# Altium PCB PCB1.pcbdoc
Units mil, origin at the board's own origin, x right, y up, seen from the top; angles counter-clockwise.
Board outline 3800 x 2700 mil, 2 copper layers (Top Layer, Bottom Layer), stack 62.2 mil thick; 15 components, 11 nets, 84 pads, 8 vias.
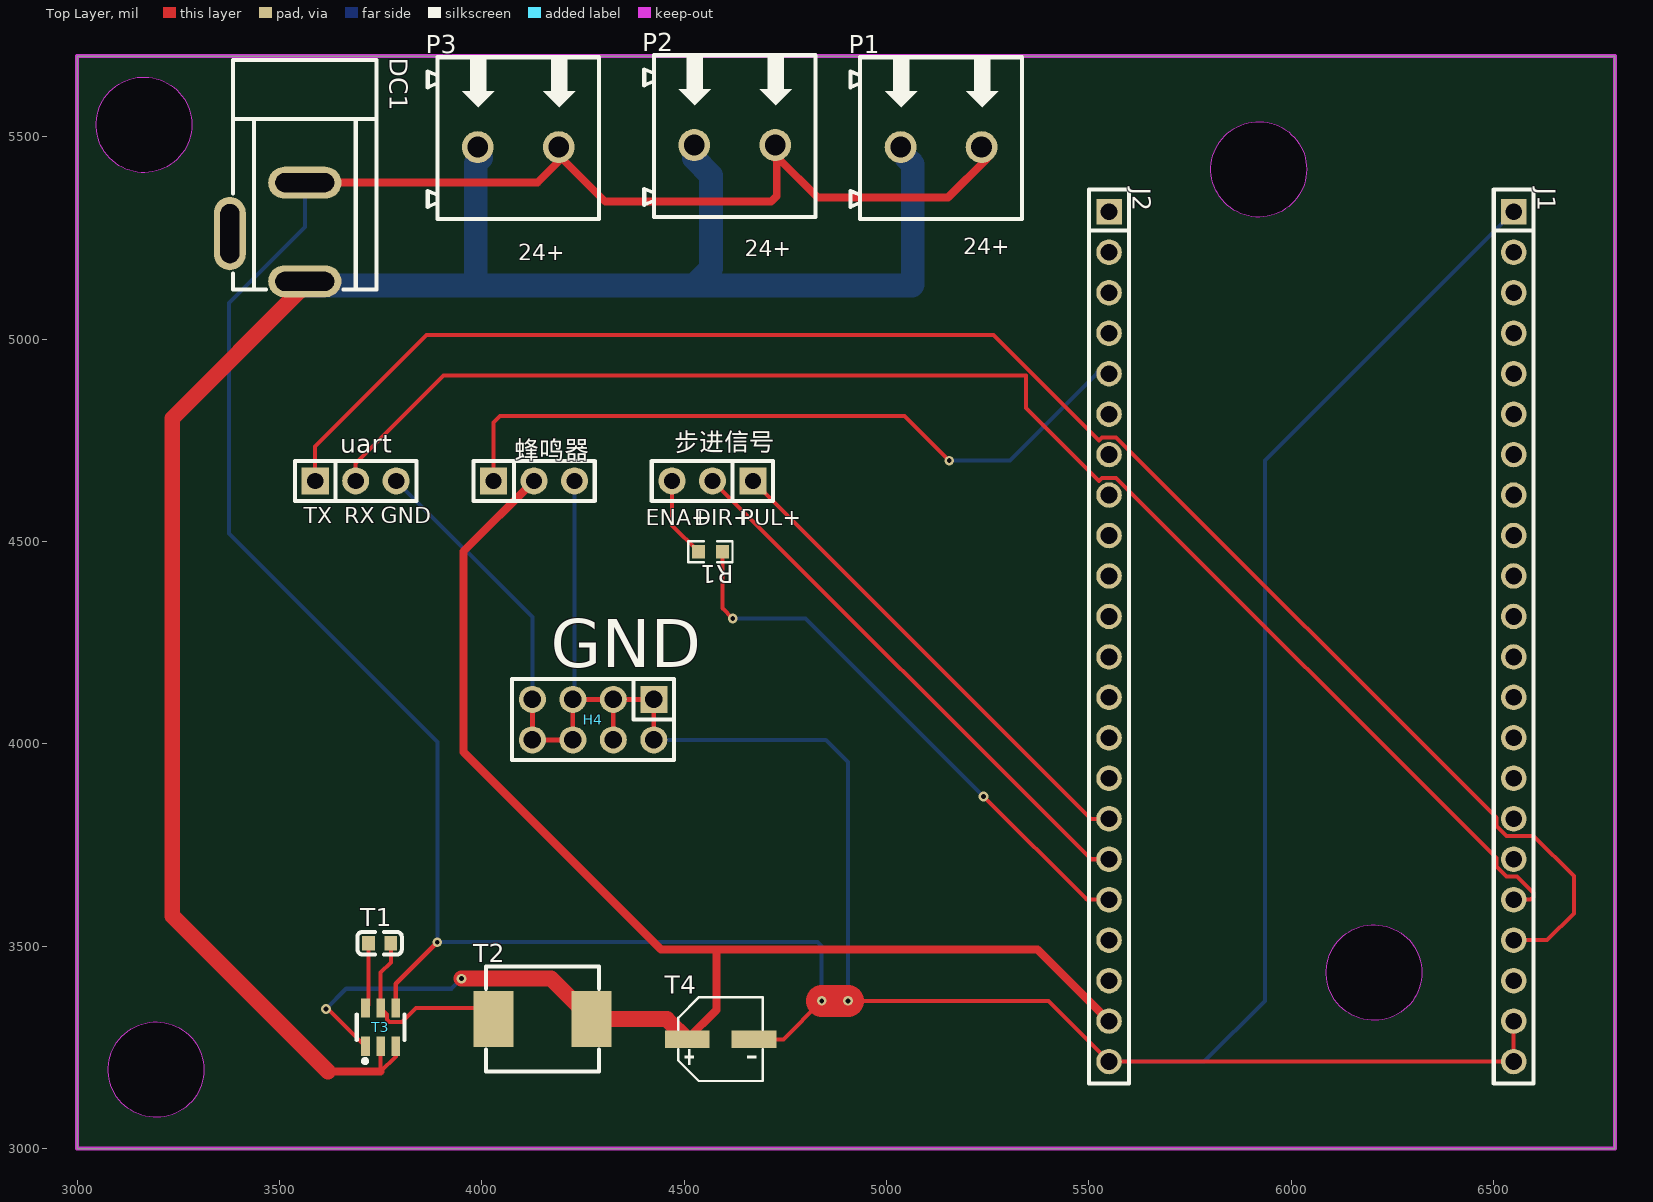
[diagram p0: Top Layer view]
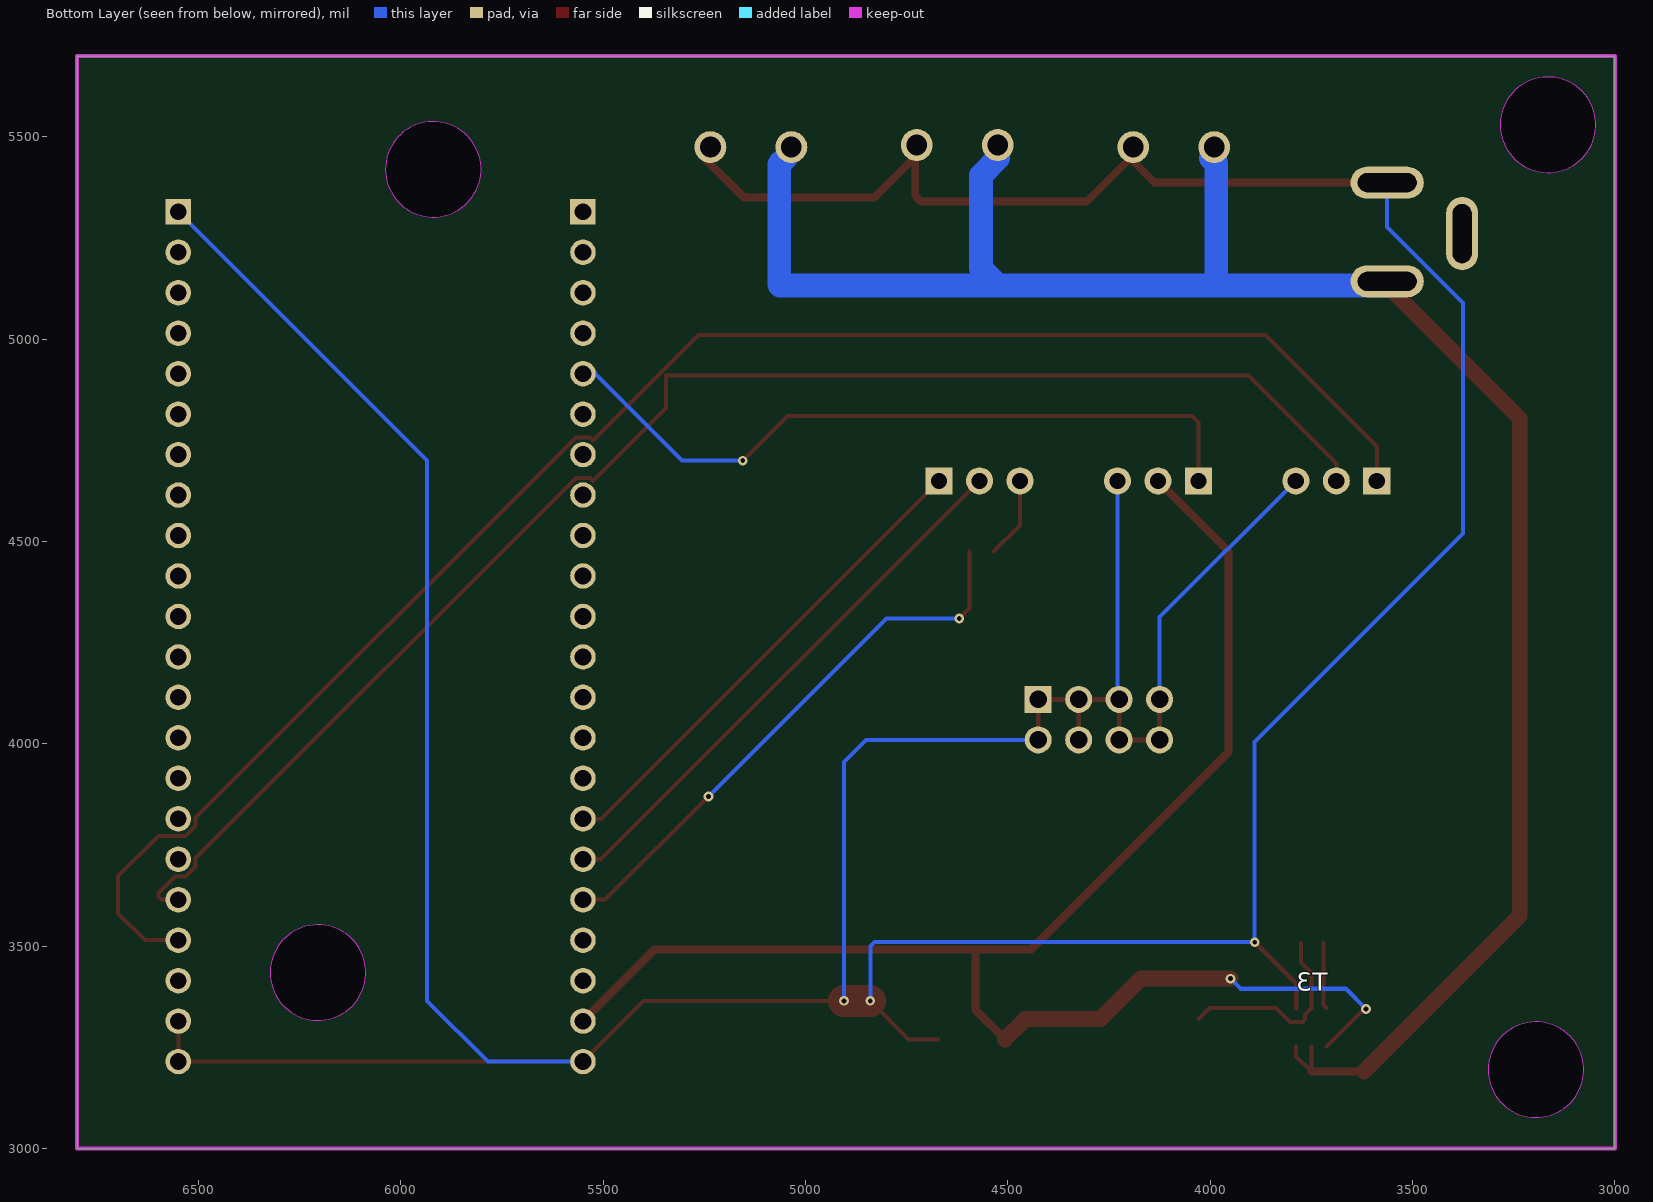
[diagram p1: Bottom Layer view, seen from below]

## Layer stack, top to bottom
Top Solder Mask Layer: solder mask 0.4, Dk 3.3
Top Layer: signal copper 1.4
Dielectric1: surface 59.4, FR4, Dk 4.5
Bottom Layer: signal copper 1.4
Bottom Solder Mask Layer: solder mask 0.4, Dk 3.3

## Board outline
3000,5700 3000,3000 6800,3000 6800,5700
cut-out: 3283.1,5530 3282.7,5520.4 3281.5,5510.8 3279.6,5501.4 3276.9,5492.1 3273.4,5483.1 3269.2,5474.5 3264.4,5466.1 3258.8,5458.3 3252.7,5450.8 3245.9,5444 3238.6,5437.7 3230.9,5432 3222.7,5426.9 3214.1,5422.6 3205.1,5418.9 3196,5416 3186.6,5413.9 3177,5412.5 3167.4,5411.9 3157.8,5412.1 3148.2,5413.1 3138.7,5414.9 3129.4,5417.4 3120.4,5420.7 3111.6,5424.7 3103.2,5429.4 3095.2,5434.7 3087.7,5440.7 3080.6,5447.3 3074.2,5454.5 3068.3,5462.1 3063.1,5470.3 3058.6,5478.8 3054.8,5487.6 3051.7,5496.7 3049.3,5506.1 3047.8,5515.6 3047,5525.2 3047,5534.8 3047.8,5544.4 3049.3,5553.9 3051.7,5563.3 3054.8,5572.4 3058.6,5581.2 3063.1,5589.7 3068.3,5597.9 3074.2,5605.5 3080.6,5612.7 3087.7,5619.3 3095.2,5625.3 3103.2,5630.6 3111.6,5635.3 3120.4,5639.3 3129.4,5642.6 3138.7,5645.1 3148.2,5646.9 3157.8,5647.9 3167.4,5648.1 3177,5647.5 3186.6,5646.1 3196,5644 3205.1,5641.1 3214.1,5637.4 3222.7,5633.1 3230.9,5628 3238.6,5622.3 3245.9,5616 3252.7,5609.2 3258.8,5601.7 3264.4,5593.9 3269.2,5585.5 3273.4,5576.9 3276.9,5567.9 3279.6,5558.6 3281.5,5549.2 3282.7,5539.6
cut-out: 3313.1,3195 3312.7,3185.4 3311.5,3175.8 3309.6,3166.4 3306.9,3157.1 3303.4,3148.1 3299.2,3139.5 3294.4,3131.1 3288.8,3123.3 3282.7,3115.8 3275.9,3109 3268.6,3102.7 3260.9,3097 3252.7,3091.9 3244.1,3087.6 3235.1,3083.9 3226,3081 3216.6,3078.9 3207,3077.5 3197.4,3076.9 3187.8,3077.1 3178.2,3078.1 3168.7,3079.9 3159.4,3082.4 3150.4,3085.7 3141.6,3089.7 3133.2,3094.4 3125.2,3099.7 3117.7,3105.7 3110.6,3112.3 3104.2,3119.5 3098.3,3127.1 3093.1,3135.3 3088.6,3143.8 3084.8,3152.6 3081.7,3161.7 3079.3,3171.1 3077.8,3180.6 3077,3190.2 3077,3199.8 3077.8,3209.4 3079.3,3218.9 3081.7,3228.3 3084.8,3237.4 3088.6,3246.2 3093.1,3254.7 3098.3,3262.9 3104.2,3270.5 3110.6,3277.7 3117.7,3284.3 3125.2,3290.3 3133.2,3295.6 3141.6,3300.3 3150.4,3304.3 3159.4,3307.6 3168.7,3310.1 3178.2,3311.9 3187.8,3312.9 3197.4,3313.1 3207,3312.5 3216.6,3311.1 3226,3309 3235.1,3306.1 3244.1,3302.4 3252.7,3298.1 3260.9,3293 3268.6,3287.3 3275.9,3281 3282.7,3274.2 3288.8,3266.7 3294.4,3258.9 3299.2,3250.5 3303.4,3241.9 3306.9,3232.9 3309.6,3223.6 3311.5,3214.2 3312.7,3204.6
cut-out: 6323.1,3435 6322.7,3425.4 6321.5,3415.8 6319.6,3406.4 6316.9,3397.1 6313.4,3388.1 6309.2,3379.5 6304.4,3371.1 6298.8,3363.3 6292.7,3355.8 6285.9,3349 6278.6,3342.7 6270.9,3337 6262.7,3331.9 6254.1,3327.6 6245.1,3323.9 6236,3321 6226.6,3318.9 6217,3317.5 6207.4,3316.9 6197.8,3317.1 6188.2,3318.1 6178.7,3319.9 6169.4,3322.4 6160.4,3325.7 6151.6,3329.7 6143.2,3334.4 6135.2,3339.7 6127.7,3345.7 6120.6,3352.3 6114.2,3359.5 6108.3,3367.1 6103.1,3375.3 6098.6,3383.8 6094.8,3392.6 6091.7,3401.7 6089.3,3411.1 6087.8,3420.6 6087,3430.2 6087,3439.8 6087.8,3449.4 6089.3,3458.9 6091.7,3468.3 6094.8,3477.4 6098.6,3486.2 6103.1,3494.7 6108.3,3502.9 6114.2,3510.5 6120.6,3517.7 6127.7,3524.3 6135.2,3530.3 6143.2,3535.6 6151.6,3540.3 6160.4,3544.3 6169.4,3547.6 6178.7,3550.1 6188.2,3551.9 6197.8,3552.9 6207.4,3553.1 6217,3552.5 6226.6,3551.1 6236,3549 6245.1,3546.1 6254.1,3542.4 6262.7,3538.1 6270.9,3533 6278.6,3527.3 6285.9,3521 6292.7,3514.2 6298.8,3506.7 6304.4,3498.9 6309.2,3490.5 6313.4,3481.9 6316.9,3472.9 6319.6,3463.6 6321.5,3454.2 6322.7,3444.6
cut-out: 6038.1,5420 6037.7,5410.4 6036.5,5400.8 6034.6,5391.4 6031.9,5382.1 6028.4,5373.1 6024.2,5364.5 6019.4,5356.1 6013.8,5348.3 6007.7,5340.8 6000.9,5334 5993.6,5327.7 5985.9,5322 5977.7,5316.9 5969.1,5312.6 5960.1,5308.9 5951,5306 5941.6,5303.9 5932,5302.5 5922.4,5301.9 5912.8,5302.1 5903.2,5303.1 5893.7,5304.9 5884.4,5307.4 5875.4,5310.7 5866.6,5314.7 5858.2,5319.4 5850.2,5324.7 5842.7,5330.7 5835.6,5337.3 5829.2,5344.5 5823.3,5352.1 5818.1,5360.3 5813.6,5368.8 5809.8,5377.6 5806.7,5386.7 5804.3,5396.1 5802.8,5405.6 5802,5415.2 5802,5424.8 5802.8,5434.4 5804.3,5443.9 5806.7,5453.3 5809.8,5462.4 5813.6,5471.2 5818.1,5479.7 5823.3,5487.9 5829.2,5495.5 5835.6,5502.7 5842.7,5509.3 5850.2,5515.3 5858.2,5520.6 5866.6,5525.3 5875.4,5529.3 5884.4,5532.6 5893.7,5535.1 5903.2,5536.9 5912.8,5537.9 5922.4,5538.1 5932,5537.5 5941.6,5536.1 5951,5534 5960.1,5531.1 5969.1,5527.4 5977.7,5523.1 5985.9,5518 5993.6,5512.3 6000.9,5506 6007.7,5499.2 6013.8,5491.7 6019.4,5483.9 6024.2,5475.5 6028.4,5466.9 6031.9,5457.9 6034.6,5448.6 6036.5,5439.2 6037.7,5429.6

## Design rules (kind name [scope] priority, off if disabled: settings)
BoardOutlineClearance copperThickness1oz [All] p0: genericclearance=10 ignorepadtopadclearanceinfootprint=FALSE except(0: Arc-SplitContinuation Track-SplitContinuation SMDPad-SplitContinuation THPad-SplitContinuation Via-SplitContinuation Fill-SplitContinuation Poly-SplitContinuation Region-SplitContinuation Text-SplitContinuation)
BoardOutlineClearance copperThickness2oz [All] p0: genericclearance=10 ignorepadtopadclearanceinfootprint=FALSE except(0: Arc-SplitContinuation Track-SplitContinuation SMDPad-SplitContinuation THPad-SplitContinuation Via-SplitContinuation Fill-SplitContinuation Poly-SplitContinuation Region-SplitContinuation Text-SplitContinuation)
BoardOutlineClearance otherClearance [All] p0: genericclearance=10 ignorepadtopadclearanceinfootprint=FALSE except(0: Arc-SplitContinuation Track-SplitContinuation SMDPad-SplitContinuation THPad-SplitContinuation Via-SplitContinuation Fill-SplitContinuation Poly-SplitContinuation Region-SplitContinuation Text-SplitContinuation)
Clearance copperThickness1oz [All] p1: gap=7 ignorepadtopadclearanceinfootprint=FALSE
Clearance copperThickness2oz [All] p1: gap=7 ignorepadtopadclearanceinfootprint=FALSE
Clearance otherClearance [All] p1: gap=7 ignorepadtopadclearanceinfootprint=FALSE
DiffPairsRouting differentialPair [All] p1: maxuncoupledlength=10 minlimit=6 maxlimit=Infinity mostfreqgap=6 toplayer_minwidth=5 toplayer_prefwidth=10 toplayer_maxwidth=100 bottomlayer_minwidth=5 bottomlayer_prefwidth=10 bottomlayer_maxwidth=100
PasteMaskExpansion pasteMaskExpansion [All] p1: expansion=0
PlaneConnect innerPlane [All] p1: planeconnectstyle=Relief reliefexpansion=20 reliefentries=4 reliefconductorwidth=10 reliefairgap=10
PolygonConnect copperRegion [All] p1: connectstyle=Relief reliefentries=4 reliefconductorwidth=10 polygonreliefangle="90 Angle" airgapwidth=10
RoutingVias viaSize [All] p1: viastyle="Through Hole" holewidth=12.0078 minholewidth=11.811 maxholewidth=248.0314 width=12.0078 minwidth=11.811 maxwidth=248.0314
SolderMaskExpansion solderMaskExpansion [IsVia] p1: useseparateexpansions=TRUE expansion=-1000 expansionbottom=-1000
SolderMaskExpansion solderMaskExpansion [All] p2: useseparateexpansions=TRUE expansion=2 expansionbottom=2
Width copperThickness1oz [All] p1: maxlimit=100 minlimit=5 preferedwidth=10
Width copperThickness2oz [All] p1: maxlimit=100 minlimit=8 preferedwidth=10

## Components (designator, comment, footprint, x,y, rotation, side; value= is the part's Value field where it differs from the comment)
DC1 "DC005" DC-IN-TH_DC005 3470,5265 r270 top
H4 "PZ254V-12-8P" HDR-TH_8P-P2.54-V-M-R2-C4-S2.54 4275,4060 r180 top
J1 "HC-PZ254-11.5L-1x22PZ" HDR-TH_22P-P2.54-V-M 6550,4265 r270 top
J2 "HC-PZ254-11.5L-1x22PZ" HDR-TH_22P-P2.54-V-M 5550,4265 r270 top
P1 "WJ500V-5.08-2P" CONN-TH_2P-P5.00_WJ500V-5.08-2P 5135,5475 r0 top
P2 "WJ500V-5.08-2P" CONN-TH_2P-P5.00_WJ500V-5.08-2P 4625,5480 r0 top
P3 "WJ500V-5.08-2P" CONN-TH_2P-P5.00_WJ500V-5.08-2P 4090,5475 r0 top
R1 "4.7kΩ" R0603 4565,4475 r180 top
T1 "10uF" C0603 3747.6,3507.6 r180 top
T2 "33uH" IND-SMD_L7.0-W6.6_FXL0650 4150,3320 r0 top
T3 "AP63205WU-7" TSOT-23-6_L2.9-W1.6-P0.95-LS2.8-BL 3750,3300 r0 top
T4 "22U25V-5*5.4mm" CAP-SMD_BD5.0-L5.3-W5.3-LS6.0-FD 4590,3270 r0 top
uart "PZ254V-11-03P" HDR-TH_3P-P2.54-V-M_PZ254V-11-03P 3688.3,4650 r0 top
步进信号 "PZ254V-11-03P" HDR-TH_3P-P2.54-V-M_PZ254V-11-03P 4570,4650 r180 top
蜂鸣器 "PZ254V-11-03P" HDR-TH_3P-P2.54-V-M_PZ254V-11-03P 4129.1,4650 r0 top

## Footprints (in the part's own frame and the unit in brackets; to place one, negate y for a bottom-side part, rotate by r counter-clockwise, add the part's x,y. Pads: shape width x height; smd on the part's side, far side on the other; paste and mask are expansions set on the pad)
C0603 [mil]
  rect 31.5x35.4 smd: 1(-27.5,0) 2(27.6,0)
  silkscreen extent -55,-28 55,28
CAP-SMD_BD5.0-L5.3-W5.3-LS6.0-FD [mil]
  rect 110.2x43.3 smd: 1(-82.7,0) 2(82.7,0)
  silkscreen extent -105,-103 105,104
CONN-TH_2P-P5.00_WJ500V-5.08-2P [mil]
  round 78.7 hole 51.2: 1(-100,0) 2(100,0)
  silkscreen extent -224,-178 200,222
DC-IN-TH_DC005 [mil]
  oval 78.7x181.1 hole 47.2 slot 145.7 at 90 deg: 1(122,92.5) 2(-122,92.5)
  oval 181.1x78.7 hole 47.2 slot 145.7 at 0 deg: 3(3.9,-92.5)
  silkscreen extent -425,-85 142,270
HDR-TH_3P-P2.54-V-M_PZ254V-11-03P [mil]
  rect 66.9x66.9 hole 40.2: 1(-100,0)
  round 66.9 hole 40.2: 2(0,0) 3(100,0)
  silkscreen extent -150,-49 150,49
HDR-TH_8P-P2.54-V-M-R2-C4-S2.54 [mil]
  rect 66.9x66.9 hole 43.3: 1(-150,-50)
  round 66.9 hole 43.3: 2(-150,50) 3(-50,-50) 4(-50,50) 5(50,-50) 6(50,50) 7(150,-50) 8(150,50)
  silkscreen extent -200,-100 200,100
HDR-TH_22P-P2.54-V-M [mil]
  rect 63x63 hole 41.3: 1(-1050,0)
  round 63 hole 41.3: 2(-950,0) 3(-850,0) 4(-750,0) 5(-650,0) 6(-550,0) 7(-450,0) 8(-350,0) 9(-250,0) 10(-150,0) 11(-50,0) 12(50,0) 13(150,0) 14(250,0) 15(350,0) 16(450,0) 17(550,0) 18(650,0) 19(750,0) 20(850,0) 21(950,0) 22(1050,0)
  silkscreen extent -1105,-49 1105,49
IND-SMD_L7.0-W6.6_FXL0650 [mil]
  rect 99.4x137.8 smd: 1(-121.2,0) 2(121.2,0)
  silkscreen extent -140,-130 140,130
R0603 [mil]
  rect 31.8x34 smd paste-3937 mask+2: 1(-29.7,0) 2(29.7,0)
  silkscreen extent -54,-26 54,26
TSOT-23-6_L2.9-W1.6-P0.95-LS2.8-BL [mil]
  rect 21.7x47.2 smd paste+0 mask+2: 1(-37.4,-47.2) 2(0,-47.2) 3(37.4,-47.2) 4(37.4,47.2) 5(0,47.2) 6(-37.4,47.2)
  silkscreen extent -59,-89 59,32

## Via types
v1: diameter 24, hole 12, Top Layer to Bottom Layer, 8 vias

## Nets (pads, with @x,y where several pads share a name; then routed paths per layer and width w, separated by ;. In a path a pad name is that pad's centre, name@x,y a point inside that pad or via, vN(x,y) a via of type N, cw(c..) or ccw(c..) an arc to the next point about the centre after c; other vN are vias at no path point)
$1N8: T1.2 T3.6 | length 163.5
  Top Layer w10: T3.6 3720,3354.6 T1.2
$1N9: T1.1 T2.1 T3.5 | length 496.9
  Top Layer w10: T1.1 3775.1,3460.1 3750,3435 T3.5 3765.6,3331.7 3765.6,3319.1 3772,3312.6 3802.8,3312.6 3837.4,3347.2 4001.6,3347.2 T2.1
+5V: J2.21 T2.2 T3.1 T4.1 蜂鸣器.2 | length 3989
  Top Layer w10: v1(3615,3345) 3620.3,3345 T3.1
  Top Layer w19.7: 蜂鸣器.2 3955,4475.9 3955,3980 4442.9,3492.1 4587.1,3492.1 ; T4.1 4580,3342.7 4580,3485 4587.1,3492.1 ; J2.21 5372.9,3492.1 4587.1,3492.1
  Top Layer w39.4: v1(3950,3420) 4171.2,3420 T2.2 4457.3,3320 T4.1
  Bottom Layer w10: v1(3615,3345) 3665,3395 3925,3395 v1(3950,3420)
DIR+: J2.17 步进信号.2 | length 1367.3
  Top Layer w10: 步进信号.2 5505,3715 J2.17
ENA: J2.18 R1.1 R1.2 步进信号.3 | length 1600.4
  Top Layer w10: 步进信号.3 4470,4540.3 R1.2 ; R1.1 4594.7,4335.3 v1(4620,4310) ; v1(5240,3870) 5495,3615 J2.18 J2.18@5550,3610
  Bottom Layer w10: v1(4620,4310) 4800,4310 v1(5240,3870)
GND: DC1.2 DC1.3 H4.1 H4.2 H4.3 H4.4 H4.5 H4.6 H4.7 H4.8 J1.1 J1.21 J1.22 J2.22 P1.2 P2.2 P3.2 T3.4 T4.2 uart.3 蜂鸣器.3 | length 13151.6
  Top Layer w10: T4.2 4745,3270 v1(4840,3365) ; v1(4905,3365) 5400,3365 J2.22 J1.22 J1.21
  Top Layer w11.8: T3.4 3787.4,3407.4 v1(3890,3510) ; H4.7 H4.8 H4.6 H4.5 H4.3 ; H4.4 H4.3 ; H4.2 H4.1 H4.3
  Top Layer w19.7: DC1.2 4137.1,5387 4197.7,5447.6 4305.3,5340 4715,5340 4728.9,5353.9 4728.9,5442.6 4723.9,5447.6 4732.4,5447.6 4830,5350 5152.4,5350 P1.2@5250,5447.6
  Top Layer w78.7: v1(4840,3365) v1(4905,3365)
  Bottom Layer w10: DC1.2 3562.5,5277.5 3375,5090 3375,4520 3890,4005 v1(3890,3510) 4830,3510 4840,3500 v1(4840,3365) ; uart.3 4125,4313.3 H4.7 ; H4.5 4229.1,4114.1 蜂鸣器.3 ; H4.2 4850,4010 4905,3955 v1(4905,3365) ; J2.22 5785,3215 5935,3365 5935,4700 J1.1
PUL+: J2.16 步进信号.1 | length 1225.9
  Top Layer w10: 步进信号.1 5505,3815 J2.16
RX: J1.18 uart.2 | length 3699.3
  Top Layer w10: uart.2 3688.3,4693.5 3904.8,4910 5345,4910 5345,4829.9 5524.9,4650 5532.4,4657.5 5567.6,4657.5 6507.5,3717.6 6507.5,3697.4 6532.4,3672.5 6558.1,3672.5 6598.6,3632.1 6598.6,3622.1 6591.5,3615 J1.18
TX: J1.19 uart.1 | length 4149.4
  Top Layer w10: uart.1 3588.3,4734.9 3863.4,5010 5264.9,5010 5524.9,4750 5532.4,4757.5 5567.6,4757.5 6507.5,3817.6 6507.5,3797.4 6532.4,3772.5 6599.5,3772.5 6698.6,3673.5 6698.6,3580.6 6632.9,3515 J1.19
VCC: DC1.1 P1.1 P2.1 P3.1 T3.2 T3.3 | length 5003
  Top Layer w10: T3.2 3750,3190 3787.4,3227.4 T3.3
  Top Layer w19.7: 3620,3190 3750,3190
  Top Layer w39.4: DC1.1@3563.9,5133 3235,4804.1 3235,3575 3620,3190
  Bottom Layer w59.1: DC1.1@3563.9,5133 3978,5133 ; P3.1@3997.7,5447.6 3985,5434.9 3985,5140 3978,5133 ; P2.1@4523.9,5447.6 4566.8,5404.7 4566.8,5174.7 4525,5133 ; P1.1@5050,5447.6 5065,5432.6 5065,5135 5063,5133 4525,5133 ; 3978,5133 4525,5133
蜂鸣器: J2.5 蜂鸣器.1 | length 1813.2
  Top Layer w10: 蜂鸣器.1 4029.1,4794.1 4045,4810 5045,4810 v1(5155,4700)
  Bottom Layer w10: v1(5155,4700) 5305,4700 J2.5@5520,4915 ; J2.5 J2.5@5522.9,4915 ; J2.5@5520,4915 5520,4917.9 J2.5@5522.9,4915 ; J2.5@5520,4915 J2.5@5522.9,4915
pads on no net: J1.2 J1.3 J1.4 J1.5 J1.6 J1.7 J1.8 J1.9 J1.10 J1.11 J1.12 J1.13 J1.14 J1.15 J1.16 J1.17 J1.20 J2.1 J2.2 J2.3 J2.4 J2.6 J2.7 J2.8 J2.9 J2.10 J2.11 J2.12 J2.13 J2.14 J2.15 J2.19 J2.20

## Keep-outs
Board Outline Layer:
  region: 3283.1,5530 3282.7,5520.4 3281.5,5510.8 3279.6,5501.4 3276.9,5492.1 3273.4,5483.1 3269.2,5474.5 3264.4,5466.1 3258.8,5458.3 3252.7,5450.8 3245.9,5444 3238.6,5437.7 3230.9,5432 3222.7,5426.9 3214.1,5422.6 3205.1,5418.9 3196,5416 3186.6,5413.9 3177,5412.5 3167.4,5411.9 3157.8,5412.1 3148.2,5413.1 3138.7,5414.9 3129.4,5417.4 3120.4,5420.7 3111.6,5424.7 3103.2,5429.4 3095.2,5434.7 3087.7,5440.7 3080.6,5447.3 3074.2,5454.5 3068.3,5462.1 3063.1,5470.3 3058.6,5478.8 3054.8,5487.6 3051.7,5496.7 3049.3,5506.1 3047.8,5515.6 3047,5525.2 3047,5534.8 3047.8,5544.4 3049.3,5553.9 3051.7,5563.3 3054.8,5572.4 3058.6,5581.2 3063.1,5589.7 3068.3,5597.9 3074.2,5605.5 3080.6,5612.7 3087.7,5619.3 3095.2,5625.3 3103.2,5630.6 3111.6,5635.3 3120.4,5639.3 3129.4,5642.6 3138.7,5645.1 3148.2,5646.9 3157.8,5647.9 3167.4,5648.1 3177,5647.5 3186.6,5646.1 3196,5644 3205.1,5641.1 3214.1,5637.4 3222.7,5633.1 3230.9,5628 3238.6,5622.3 3245.9,5616 3252.7,5609.2 3258.8,5601.7 3264.4,5593.9 3269.2,5585.5 3273.4,5576.9 3276.9,5567.9 3279.6,5558.6 3281.5,5549.2 3282.7,5539.6
  region: 3283.1,5530 3282.7,5520.4 3281.5,5510.8 3279.6,5501.4 3276.9,5492.1 3273.4,5483.1 3269.2,5474.5 3264.4,5466.1 3258.8,5458.3 3252.7,5450.8 3245.9,5444 3238.6,5437.7 3230.9,5432 3222.7,5426.9 3214.1,5422.6 3205.1,5418.9 3196,5416 3186.6,5413.9 3177,5412.5 3167.4,5411.9 3157.8,5412.1 3148.2,5413.1 3138.7,5414.9 3129.4,5417.4 3120.4,5420.7 3111.6,5424.7 3103.2,5429.4 3095.2,5434.7 3087.7,5440.7 3080.6,5447.3 3074.2,5454.5 3068.3,5462.1 3063.1,5470.3 3058.6,5478.8 3054.8,5487.6 3051.7,5496.7 3049.3,5506.1 3047.8,5515.6 3047,5525.2 3047,5534.8 3047.8,5544.4 3049.3,5553.9 3051.7,5563.3 3054.8,5572.4 3058.6,5581.2 3063.1,5589.7 3068.3,5597.9 3074.2,5605.5 3080.6,5612.7 3087.7,5619.3 3095.2,5625.3 3103.2,5630.6 3111.6,5635.3 3120.4,5639.3 3129.4,5642.6 3138.7,5645.1 3148.2,5646.9 3157.8,5647.9 3167.4,5648.1 3177,5647.5 3186.6,5646.1 3196,5644 3205.1,5641.1 3214.1,5637.4 3222.7,5633.1 3230.9,5628 3238.6,5622.3 3245.9,5616 3252.7,5609.2 3258.8,5601.7 3264.4,5593.9 3269.2,5585.5 3273.4,5576.9 3276.9,5567.9 3279.6,5558.6 3281.5,5549.2 3282.7,5539.6
  region: 3313.1,3195 3312.7,3185.4 3311.5,3175.8 3309.6,3166.4 3306.9,3157.1 3303.4,3148.1 3299.2,3139.5 3294.4,3131.1 3288.8,3123.3 3282.7,3115.8 3275.9,3109 3268.6,3102.7 3260.9,3097 3252.7,3091.9 3244.1,3087.6 3235.1,3083.9 3226,3081 3216.6,3078.9 3207,3077.5 3197.4,3076.9 3187.8,3077.1 3178.2,3078.1 3168.7,3079.9 3159.4,3082.4 3150.4,3085.7 3141.6,3089.7 3133.2,3094.4 3125.2,3099.7 3117.7,3105.7 3110.6,3112.3 3104.2,3119.5 3098.3,3127.1 3093.1,3135.3 3088.6,3143.8 3084.8,3152.6 3081.7,3161.7 3079.3,3171.1 3077.8,3180.6 3077,3190.2 3077,3199.8 3077.8,3209.4 3079.3,3218.9 3081.7,3228.3 3084.8,3237.4 3088.6,3246.2 3093.1,3254.7 3098.3,3262.9 3104.2,3270.5 3110.6,3277.7 3117.7,3284.3 3125.2,3290.3 3133.2,3295.6 3141.6,3300.3 3150.4,3304.3 3159.4,3307.6 3168.7,3310.1 3178.2,3311.9 3187.8,3312.9 3197.4,3313.1 3207,3312.5 3216.6,3311.1 3226,3309 3235.1,3306.1 3244.1,3302.4 3252.7,3298.1 3260.9,3293 3268.6,3287.3 3275.9,3281 3282.7,3274.2 3288.8,3266.7 3294.4,3258.9 3299.2,3250.5 3303.4,3241.9 3306.9,3232.9 3309.6,3223.6 3311.5,3214.2 3312.7,3204.6
  region: 3313.1,3195 3312.7,3185.4 3311.5,3175.8 3309.6,3166.4 3306.9,3157.1 3303.4,3148.1 3299.2,3139.5 3294.4,3131.1 3288.8,3123.3 3282.7,3115.8 3275.9,3109 3268.6,3102.7 3260.9,3097 3252.7,3091.9 3244.1,3087.6 3235.1,3083.9 3226,3081 3216.6,3078.9 3207,3077.5 3197.4,3076.9 3187.8,3077.1 3178.2,3078.1 3168.7,3079.9 3159.4,3082.4 3150.4,3085.7 3141.6,3089.7 3133.2,3094.4 3125.2,3099.7 3117.7,3105.7 3110.6,3112.3 3104.2,3119.5 3098.3,3127.1 3093.1,3135.3 3088.6,3143.8 3084.8,3152.6 3081.7,3161.7 3079.3,3171.1 3077.8,3180.6 3077,3190.2 3077,3199.8 3077.8,3209.4 3079.3,3218.9 3081.7,3228.3 3084.8,3237.4 3088.6,3246.2 3093.1,3254.7 3098.3,3262.9 3104.2,3270.5 3110.6,3277.7 3117.7,3284.3 3125.2,3290.3 3133.2,3295.6 3141.6,3300.3 3150.4,3304.3 3159.4,3307.6 3168.7,3310.1 3178.2,3311.9 3187.8,3312.9 3197.4,3313.1 3207,3312.5 3216.6,3311.1 3226,3309 3235.1,3306.1 3244.1,3302.4 3252.7,3298.1 3260.9,3293 3268.6,3287.3 3275.9,3281 3282.7,3274.2 3288.8,3266.7 3294.4,3258.9 3299.2,3250.5 3303.4,3241.9 3306.9,3232.9 3309.6,3223.6 3311.5,3214.2 3312.7,3204.6
  region: 6323.1,3435 6322.7,3425.4 6321.5,3415.8 6319.6,3406.4 6316.9,3397.1 6313.4,3388.1 6309.2,3379.5 6304.4,3371.1 6298.8,3363.3 6292.7,3355.8 6285.9,3349 6278.6,3342.7 6270.9,3337 6262.7,3331.9 6254.1,3327.6 6245.1,3323.9 6236,3321 6226.6,3318.9 6217,3317.5 6207.4,3316.9 6197.8,3317.1 6188.2,3318.1 6178.7,3319.9 6169.4,3322.4 6160.4,3325.7 6151.6,3329.7 6143.2,3334.4 6135.2,3339.7 6127.7,3345.7 6120.6,3352.3 6114.2,3359.5 6108.3,3367.1 6103.1,3375.3 6098.6,3383.8 6094.8,3392.6 6091.7,3401.7 6089.3,3411.1 6087.8,3420.6 6087,3430.2 6087,3439.8 6087.8,3449.4 6089.3,3458.9 6091.7,3468.3 6094.8,3477.4 6098.6,3486.2 6103.1,3494.7 6108.3,3502.9 6114.2,3510.5 6120.6,3517.7 6127.7,3524.3 6135.2,3530.3 6143.2,3535.6 6151.6,3540.3 6160.4,3544.3 6169.4,3547.6 6178.7,3550.1 6188.2,3551.9 6197.8,3552.9 6207.4,3553.1 6217,3552.5 6226.6,3551.1 6236,3549 6245.1,3546.1 6254.1,3542.4 6262.7,3538.1 6270.9,3533 6278.6,3527.3 6285.9,3521 6292.7,3514.2 6298.8,3506.7 6304.4,3498.9 6309.2,3490.5 6313.4,3481.9 6316.9,3472.9 6319.6,3463.6 6321.5,3454.2 6322.7,3444.6
  region: 6323.1,3435 6322.7,3425.4 6321.5,3415.8 6319.6,3406.4 6316.9,3397.1 6313.4,3388.1 6309.2,3379.5 6304.4,3371.1 6298.8,3363.3 6292.7,3355.8 6285.9,3349 6278.6,3342.7 6270.9,3337 6262.7,3331.9 6254.1,3327.6 6245.1,3323.9 6236,3321 6226.6,3318.9 6217,3317.5 6207.4,3316.9 6197.8,3317.1 6188.2,3318.1 6178.7,3319.9 6169.4,3322.4 6160.4,3325.7 6151.6,3329.7 6143.2,3334.4 6135.2,3339.7 6127.7,3345.7 6120.6,3352.3 6114.2,3359.5 6108.3,3367.1 6103.1,3375.3 6098.6,3383.8 6094.8,3392.6 6091.7,3401.7 6089.3,3411.1 6087.8,3420.6 6087,3430.2 6087,3439.8 6087.8,3449.4 6089.3,3458.9 6091.7,3468.3 6094.8,3477.4 6098.6,3486.2 6103.1,3494.7 6108.3,3502.9 6114.2,3510.5 6120.6,3517.7 6127.7,3524.3 6135.2,3530.3 6143.2,3535.6 6151.6,3540.3 6160.4,3544.3 6169.4,3547.6 6178.7,3550.1 6188.2,3551.9 6197.8,3552.9 6207.4,3553.1 6217,3552.5 6226.6,3551.1 6236,3549 6245.1,3546.1 6254.1,3542.4 6262.7,3538.1 6270.9,3533 6278.6,3527.3 6285.9,3521 6292.7,3514.2 6298.8,3506.7 6304.4,3498.9 6309.2,3490.5 6313.4,3481.9 6316.9,3472.9 6319.6,3463.6 6321.5,3454.2 6322.7,3444.6
  region: 6038.1,5420 6037.7,5410.4 6036.5,5400.8 6034.6,5391.4 6031.9,5382.1 6028.4,5373.1 6024.2,5364.5 6019.4,5356.1 6013.8,5348.3 6007.7,5340.8 6000.9,5334 5993.6,5327.7 5985.9,5322 5977.7,5316.9 5969.1,5312.6 5960.1,5308.9 5951,5306 5941.6,5303.9 5932,5302.5 5922.4,5301.9 5912.8,5302.1 5903.2,5303.1 5893.7,5304.9 5884.4,5307.4 5875.4,5310.7 5866.6,5314.7 5858.2,5319.4 5850.2,5324.7 5842.7,5330.7 5835.6,5337.3 5829.2,5344.5 5823.3,5352.1 5818.1,5360.3 5813.6,5368.8 5809.8,5377.6 5806.7,5386.7 5804.3,5396.1 5802.8,5405.6 5802,5415.2 5802,5424.8 5802.8,5434.4 5804.3,5443.9 5806.7,5453.3 5809.8,5462.4 5813.6,5471.2 5818.1,5479.7 5823.3,5487.9 5829.2,5495.5 5835.6,5502.7 5842.7,5509.3 5850.2,5515.3 5858.2,5520.6 5866.6,5525.3 5875.4,5529.3 5884.4,5532.6 5893.7,5535.1 5903.2,5536.9 5912.8,5537.9 5922.4,5538.1 5932,5537.5 5941.6,5536.1 5951,5534 5960.1,5531.1 5969.1,5527.4 5977.7,5523.1 5985.9,5518 5993.6,5512.3 6000.9,5506 6007.7,5499.2 6013.8,5491.7 6019.4,5483.9 6024.2,5475.5 6028.4,5466.9 6031.9,5457.9 6034.6,5448.6 6036.5,5439.2 6037.7,5429.6
  region: 6038.1,5420 6037.7,5410.4 6036.5,5400.8 6034.6,5391.4 6031.9,5382.1 6028.4,5373.1 6024.2,5364.5 6019.4,5356.1 6013.8,5348.3 6007.7,5340.8 6000.9,5334 5993.6,5327.7 5985.9,5322 5977.7,5316.9 5969.1,5312.6 5960.1,5308.9 5951,5306 5941.6,5303.9 5932,5302.5 5922.4,5301.9 5912.8,5302.1 5903.2,5303.1 5893.7,5304.9 5884.4,5307.4 5875.4,5310.7 5866.6,5314.7 5858.2,5319.4 5850.2,5324.7 5842.7,5330.7 5835.6,5337.3 5829.2,5344.5 5823.3,5352.1 5818.1,5360.3 5813.6,5368.8 5809.8,5377.6 5806.7,5386.7 5804.3,5396.1 5802.8,5405.6 5802,5415.2 5802,5424.8 5802.8,5434.4 5804.3,5443.9 5806.7,5453.3 5809.8,5462.4 5813.6,5471.2 5818.1,5479.7 5823.3,5487.9 5829.2,5495.5 5835.6,5502.7 5842.7,5509.3 5850.2,5515.3 5858.2,5520.6 5866.6,5525.3 5875.4,5529.3 5884.4,5532.6 5893.7,5535.1 5903.2,5536.9 5912.8,5537.9 5922.4,5538.1 5932,5537.5 5941.6,5536.1 5951,5534 5960.1,5531.1 5969.1,5527.4 5977.7,5523.1 5985.9,5518 5993.6,5512.3 6000.9,5506 6007.7,5499.2 6013.8,5491.7 6019.4,5483.9 6024.2,5475.5 6028.4,5466.9 6031.9,5457.9 6034.6,5448.6 6036.5,5439.2 6037.7,5429.6
  lines w0.1: 3047,5525.2 3047.8,5515.6 3049.3,5506.1 3051.7,5496.7 3054.8,5487.6 3058.6,5478.8 3063.1,5470.3 3068.3,5462.1 3074.2,5454.5 3080.6,5447.3 3087.7,5440.7 3095.2,5434.7 3103.2,5429.4 3111.6,5424.7 3120.4,5420.7 3129.4,5417.4 3138.7,5414.9 3148.2,5413.1 3157.8,5412.1 3167.4,5411.9 3177,5412.5 3186.6,5413.9 3196,5416 3205.1,5418.9 3214.1,5422.6 3222.7,5426.9 3230.9,5432 3238.6,5437.7 3245.9,5444 3252.7,5450.8 3258.8,5458.3 3264.4,5466.1 3269.2,5474.5 3273.4,5483.1 3276.9,5492.1 3279.6,5501.4 3281.5,5510.8 3282.7,5520.4 3283.1,5530 3282.7,5539.6 3281.5,5549.2 3279.6,5558.6 3276.9,5567.9 3273.4,5576.9 3269.2,5585.5 3264.4,5593.9 3258.8,5601.7 3252.7,5609.2 3245.9,5616 3238.6,5622.3 3230.9,5628 3222.7,5633.1 3214.1,5637.4 3205.1,5641.1 3196,5644 3186.6,5646.1 3177,5647.5 3167.4,5648.1 3157.8,5647.9 3148.2,5646.9 3138.7,5645.1 3129.4,5642.6 3120.4,5639.3 3111.6,5635.3 3103.2,5630.6 3095.2,5625.3 3087.7,5619.3 3080.6,5612.7 3074.2,5605.5 3068.3,5597.9 3063.1,5589.7 3058.6,5581.2 3054.8,5572.4 3051.7,5563.3 3049.3,5553.9 3047.8,5544.4 3047,5534.8 3047,5525.2 ; 3077,3190.2 3077.8,3180.6 3079.3,3171.1 3081.7,3161.7 3084.8,3152.6 3088.6,3143.8 3093.1,3135.3 3098.3,3127.1 3104.2,3119.5 3110.6,3112.3 3117.7,3105.7 3125.2,3099.7 3133.2,3094.4 3141.6,3089.7 3150.4,3085.7 3159.4,3082.4 3168.7,3079.9 3178.2,3078.1 3187.8,3077.1 3197.4,3076.9 3207,3077.5 3216.6,3078.9 3226,3081 3235.1,3083.9 3244.1,3087.6 3252.7,3091.9 3260.9,3097 3268.6,3102.7 3275.9,3109 3282.7,3115.8 3288.8,3123.3 3294.4,3131.1 3299.2,3139.5 3303.4,3148.1 3306.9,3157.1 3309.6,3166.4 3311.5,3175.8 3312.7,3185.4 3313.1,3195 3312.7,3204.6 3311.5,3214.2 3309.6,3223.6 3306.9,3232.9 3303.4,3241.9 3299.2,3250.5 3294.4,3258.9 3288.8,3266.7 3282.7,3274.2 3275.9,3281 3268.6,3287.3 3260.9,3293 3252.7,3298.1 3244.1,3302.4 3235.1,3306.1 3226,3309 3216.6,3311.1 3207,3312.5 3197.4,3313.1 3187.8,3312.9 3178.2,3311.9 3168.7,3310.1 3159.4,3307.6 3150.4,3304.3 3141.6,3300.3 3133.2,3295.6 3125.2,3290.3 3117.7,3284.3 3110.6,3277.7 3104.2,3270.5 3098.3,3262.9 3093.1,3254.7 3088.6,3246.2 3084.8,3237.4 3081.7,3228.3 3079.3,3218.9 3077.8,3209.4 3077,3199.8 3077,3190.2 ; 5802,5415.2 5802.8,5405.6 5804.3,5396.1 5806.7,5386.7 5809.8,5377.6 5813.6,5368.8 5818.1,5360.3 5823.3,5352.1 5829.2,5344.5 5835.6,5337.3 5842.7,5330.7 5850.2,5324.7 5858.2,5319.4 5866.6,5314.7 5875.4,5310.7 5884.4,5307.4 5893.7,5304.9 5903.2,5303.1 5912.8,5302.1 5922.4,5301.9 5932,5302.5 5941.6,5303.9 5951,5306 5960.1,5308.9 5969.1,5312.6 5977.7,5316.9 5985.9,5322 5993.6,5327.7 6000.9,5334 6007.7,5340.8 6013.8,5348.3 6019.4,5356.1 6024.2,5364.5 6028.4,5373.1 6031.9,5382.1 6034.6,5391.4 6036.5,5400.8 6037.7,5410.4 6038.1,5420 6037.7,5429.6 6036.5,5439.2 6034.6,5448.6 6031.9,5457.9 6028.4,5466.9 6024.2,5475.5 6019.4,5483.9 6013.8,5491.7 6007.7,5499.2 6000.9,5506 5993.6,5512.3 5985.9,5518 5977.7,5523.1 5969.1,5527.4 5960.1,5531.1 5951,5534 5941.6,5536.1 5932,5537.5 5922.4,5538.1 5912.8,5537.9 5903.2,5536.9 5893.7,5535.1 5884.4,5532.6 5875.4,5529.3 5866.6,5525.3 5858.2,5520.6 5850.2,5515.3 5842.7,5509.3 5835.6,5502.7 5829.2,5495.5 5823.3,5487.9 5818.1,5479.7 5813.6,5471.2 5809.8,5462.4 5806.7,5453.3 5804.3,5443.9 5802.8,5434.4 5802,5424.8 5802,5415.2 ; 6087,3430.2 6087.8,3420.6 6089.3,3411.1 6091.7,3401.7 6094.8,3392.6 6098.6,3383.8 6103.1,3375.3 6108.3,3367.1 6114.2,3359.5 6120.6,3352.3 6127.7,3345.7 6135.2,3339.7 6143.2,3334.4 6151.6,3329.7 6160.4,3325.7 6169.4,3322.4 6178.7,3319.9 6188.2,3318.1 6197.8,3317.1 6207.4,3316.9 6217,3317.5 6226.6,3318.9 6236,3321 6245.1,3323.9 6254.1,3327.6 6262.7,3331.9 6270.9,3337 6278.6,3342.7 6285.9,3349 6292.7,3355.8 6298.8,3363.3 6304.4,3371.1 6309.2,3379.5 6313.4,3388.1 6316.9,3397.1 6319.6,3406.4 6321.5,3415.8 6322.7,3425.4 6323.1,3435 6322.7,3444.6 6321.5,3454.2 6319.6,3463.6 6316.9,3472.9 6313.4,3481.9 6309.2,3490.5 6304.4,3498.9 6298.8,3506.7 6292.7,3514.2 6285.9,3521 6278.6,3527.3 6270.9,3533 6262.7,3538.1 6254.1,3542.4 6245.1,3546.1 6236,3549 6226.6,3551.1 6217,3552.5 6207.4,3553.1 6197.8,3552.9 6188.2,3551.9 6178.7,3550.1 6169.4,3547.6 6160.4,3544.3 6151.6,3540.3 6143.2,3535.6 6135.2,3530.3 6127.7,3524.3 6120.6,3517.7 6114.2,3510.5 6108.3,3502.9 6103.1,3494.7 6098.6,3486.2 6094.8,3477.4 6091.7,3468.3 6089.3,3458.9 6087.8,3449.4 6087,3439.8 6087,3430.2
  lines w10: 3000,3000 3000,5700 6800,5700 6800,3000 3000,3000

## Silkscreen, mask and mechanical layers (free items; w line width, h text height)
Top Silkscreen Layer:
  text "24+" at 5190,5210 h39.4
  text "24+" at 4650,5205 h39.4
  text "24+" at 4090,5195 h39.4
  text "TX" at 3560,4545 h39.4
  text "RX" at 3660,4545 h39.4
  text "GND" at 3750,4545 h39.4
  text "ENA+" at 4405,4540 h39.4
  text "DIR+" at 4525,4540 h39.4
  text "PUL+" at 4640,4540 h39.4
  text "GND" at 4170,4190 h118.1
Mechanical Layer:
  drawing of 308 lines, arcs and shapes, not listed